# EAGLE board OSO-MISC-21-002 Sensor Watch Environment (EAGLE 9.6.2)
REV: D
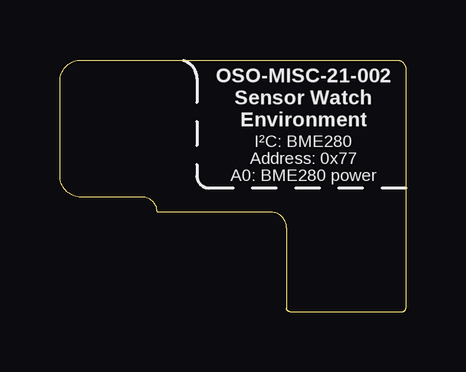
[diagram p0: board, top side]
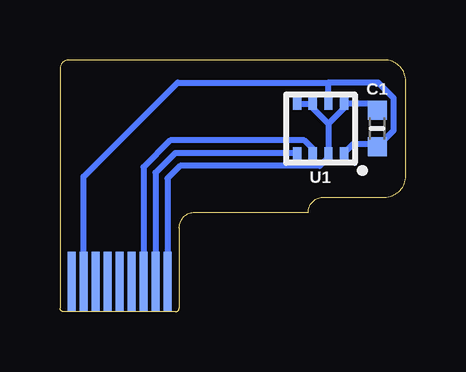
[diagram p1: board, bottom side, seen from below]

Size 14.43 x 10.48 mm. Coordinates in mm from the lower left corner, seen from the top.
Outline: 9.45,3.5 arc90 8.81,4.14 4.06,4.14 arc90 3.43,4.77 0.89,4.77 arc-90 0,5.66 0,9.6 arc-90 0.89,10.48 14.05,10.48 arc-90 14.43,10.1 14.43,3.5
Copper layers (1*16): Top 0.035559375mm / dielectric 4mil / Bottom 0.035559375mm
Design rules "oshpark-2layer *": minimum track width 6mil, minimum drill 10mil, track to track 6mil, track to pad 6mil, pad to pad 6mil, via to via 6mil, smd to smd 6mil, copper to edge 15mil, drill to drill 6mil, minimum pad ring 5mil, minimum via ring 5mil, stop-mask expansion 2.5mil, vias tented up to drill 12mil, thermal gap 10mil
Net classes: 0 default: width 0.254 mm; 1 power: width 0.254 mm; 2 gnd: width 0.254 mm

## Footprints (pad centres in the part's own frame; a part is rotated, then mirrored left to right if it is on the bottom)
_0603MP = smd 0.8 x 0.8: 1 -0.762,0; 2 0.762,0
BME280_LGA = smd 0.5 x 0.35: P$1 1.025,0.975; P$2 1.025,0.325; P$3 1.025,-0.325; P$4 1.025,-0.975; P$5 -1.025,-0.975; P$6 -1.025,-0.325; P$7 -1.025,0.325; P$8 -1.025,0.975
FH19C9S05SH10-FFC = smd 0.347 x 2.5 bottom: 1 2,-2.25; 2 1.5,-2.25; 3 1,-2.25; 4 0.5,-2.25; 5 0,-2.25; 6 -0.5,-2.25; 7 -1,-2.25; 8 -1.5,-2.25; 9 -2,-2.25

## Placement (x,y rotation side)
C1  1uF  [_0603MP]  1.19,7.63 270 bottom
U1  BME280  [BME280_LGA]  3.56,7.63 270 bottom
U$3  FH19C-9S-0.5SH_10-FFC  [FH19C9S05SH10-FFC]  11.94,3.5 0 top

## Library data of the parts
C1 = microbuilder
U1 = BME280ComponentLibrary; PROD_ID: IC-13090
U$3 = FH19C-9S-0.5SH

## Nets
3.3V [power]: U$3.1
BME_PWR: C1.1 U1.P$2 U1.P$5 U1.P$6 U1.P$8 U$3.9
GND [gnd]: C1.2 U1.P$1 U1.P$7 U$3.2
SCL: U1.P$4 U$3.8
SDA: U1.P$3 U$3.7

## Tracks (layer width: path | path; a pad name or v marks a point on that pad's centre or on a via)
BME_PWR
  Bottom 0.254: U$3.9 9.94,5.55 9.42,6.07 3.59,6.07 3.23,6.43 U1.P$2 3.23,7.83 | 3.23,7.83 2.58,8.48 U1.P$8 1.46,8.65 C1.1 | 3.23,7.83 3.88,8.48 U1.P$6 U1.P$5
GND
  Bottom 0.254: U$3.2 13.44,5.62 9.52,9.54 3.23,9.54 | U1.P$7 3.23,9.49 3.23,9.54 | U1.P$1 2.19,6.99 1.32,6.99 C1.2 0.51,7.55 0.51,8.9 1.15,9.54 3.23,9.54
SCL
  Bottom 0.254: U1.P$4 9.62,6.6 10.44,5.79 U$3.8
SDA
  Bottom 0.254: U1.P$3 3.88,6.78 4.24,7.13 9.83,7.13 10.94,6.02 U$3.7

## Text on the board
tPlace: OSO-MISC-21-002 / Sensor Watch / Environment | I²C: BME280 / Address: 0x77 / A0: BME280 power